# EAGLE board DevBit-MAX30102 (EAGLE 7.3.0)
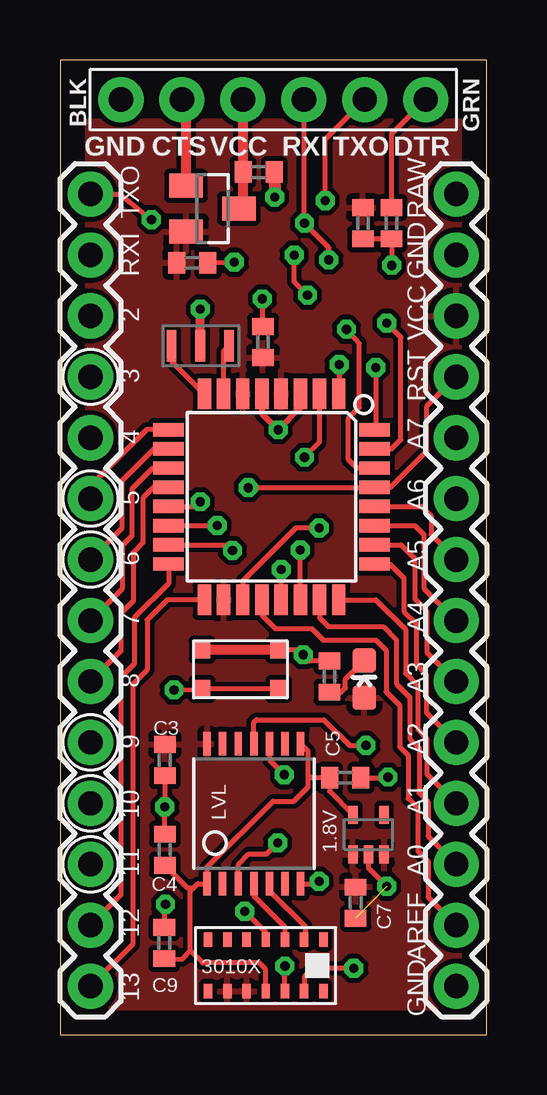
[diagram p0: board, top side]
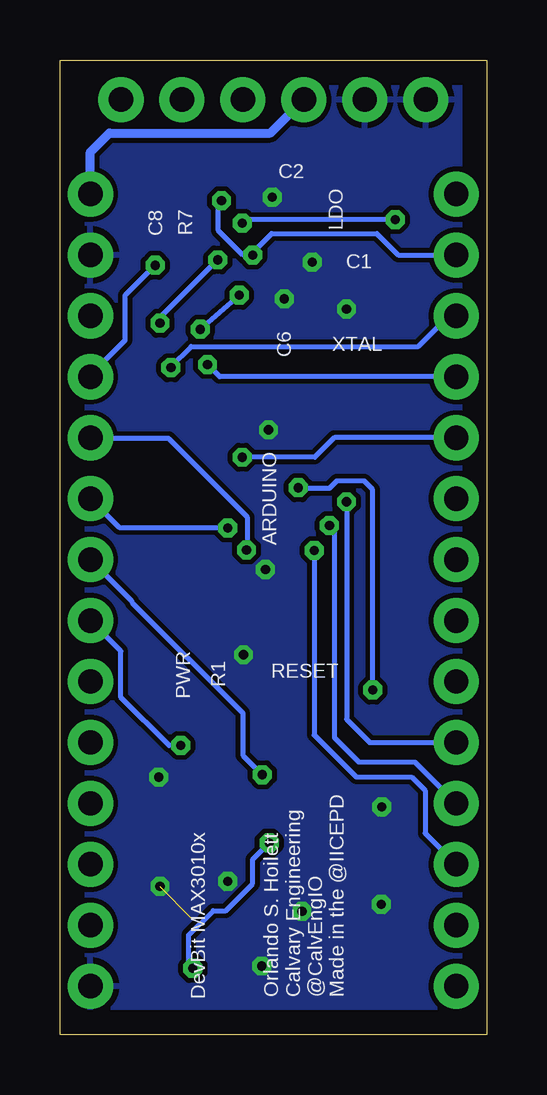
[diagram p1: board, bottom side, seen from below]

Size 17.78 x 40.64 mm. Coordinates in mm from the lower left corner, seen from the top.
Outline: 0,0 17.78,0 17.78,40.64 0,40.64 0,0
Copper layers (1*16): Top 0.035mm / dielectric 1.5mm / Bottom 0.035mm
Design rules "default": minimum track width 10mil, minimum drill 24mil, track to track 8mil, track to pad 8mil, pad to pad 8mil, via to via 8mil, smd to smd 8mil, copper to edge 40mil, drill to drill 8mil, minimum pad ring 10mil, minimum via ring 8mil, stop-mask expansion 4mil, vias tented up to drill 0mil, thermal gap 10mil

## Footprints (pad centres in the part's own frame; a part is rotated, then mirrored left to right if it is on the bottom)
SC-70-5 = smd 0.4 x 0.75: 1 -0.65,-0.825; 2 0,-0.825; 3 0.65,-0.825; 4 0.65,0.825; 5 -0.65,0.825
OESIP14 = smd 0.6 x 0.35: 1 -1.08,2.54; 2 -1.08,1.74; 3 -1.08,0.94; 4 -1.08,0.14; 5 -1.08,-0.66; 6 -1.08,-1.46; 7 -1.08,-2.26; 8 1.07,-2.26; 9 1.07,-1.46; 10 1.07,-0.66; 11 1.07,0.14; 12 1.07,0.94; 13 1.07,1.74; 14 1.07,2.54
TQFP32-08 = smd 1.27 x 0.559: 1 -4.293,2.8; 2 -4.293,2; 3 -4.293,1.2; 4 -4.293,0.4; 5 -4.293,-0.4; 6 -4.293,-1.2; 7 -4.293,-2; 8 -4.293,-2.8; 17 4.293,-2.8; 18 4.293,-2; 19 4.293,-1.2; 20 4.293,-0.4; 21 4.293,0.4; 22 4.293,1.2; 23 4.293,2; 24 4.293,2.8 | smd 0.559 x 1.27: 9 -2.8,-4.293; 10 -2,-4.293; 11 -1.2,-4.293; 12 -0.4,-4.293; 13 0.4,-4.293; 14 1.2,-4.293; 15 2,-4.293; 16 2.8,-4.293; 25 2.8,4.293; 26 2,4.293; 27 1.2,4.293; 28 0.4,4.293; 29 -0.4,4.293; 30 -1.2,4.293; 31 -2,4.293; 32 -2.8,4.293
C0402 = smd 0.7 x 0.9: 1 -0.65,0; 2 0.65,0
FTDI_DEVICE = drill 1.016 pad 1.88: CTS 3.81,0; DTR -6.35,0; GND 6.35,0; RXI -1.27,0; TXO -3.81,0; VCC 1.27,0
SOT23 = smd 1 x 1.4: 1 -0.95,-1.1; 2 0.95,-1.1; 3 0,1.1
TSSOP14 = smd 0.305 x 0.991: 1 -1.95,-2.918; 2 -1.3,-2.918; 3 -0.65,-2.918; 4 0,-2.918; 5 0.65,-2.918; 6 1.3,-2.918; 7 1.95,-2.918; 8 1.95,2.918; 9 1.3,2.918; 10 0.65,2.918; 11 0,2.918; 12 -0.65,2.918; 13 -1.3,2.918; 14 -1.95,2.918
DEVBIT-BASIC-V1 = drill 1.016 pad 1.88: 1 -8.89,17.78; 2 -8.89,15.24; 3 -8.89,12.7; 4 -8.89,10.16; 5 -8.89,7.62; 6 -8.89,5.08; 7 -8.89,2.54; 8 -8.89,0; 9 -8.89,-2.54; 10 -8.89,-5.08; 11 -8.89,-7.62; 12 -8.89,-10.16; 13 -8.89,-12.7; 14 -8.89,-15.24; 15 6.35,-15.24; 16 6.35,-12.7; 17 6.35,-10.16; 18 6.35,-7.62; 19 6.35,-5.08; 20 6.35,-2.54; 21 6.35,0; 22 6.35,2.54; 23 6.35,5.08; 24 6.35,7.62; 25 6.35,10.16; 26 6.35,12.7; 27 6.35,15.24; 28 6.35,17.78
LED-0603 = smd 1 x 1: A 0,-0.677; C 0,0.877
R0402 = smd 0.7 x 0.9: 1 -0.65,0; 2 0.65,0
BUTTON-GULLWING = smd 0.7 x 0.75: 1 -1.6,0.825; 2 1.6,0.825; 3 -1.6,-0.825; 4 1.6,-0.825
RESONATOR-00 = smd 0.4 x 1.3: 1 1.2,0; 2 0,0; 3 -1.2,0

## Placement (x,y rotation side)
1.8V  MIC5365/6  [SC-70-5]  12.85,8.36 0 top
3010X  MAX30100  [OESIP14]  8.43,2.9 270 top
ARDUINO  ATMEGA328P  [TQFP32-08]  8.81,22.43 270 top
C1  2.2u  [C0402]  5.51,32.18 0 top
C2  2.2u  [C0402]  8.28,35.97 0 top
C3  0.1u  [C0402]  4.37,11.46 270 top
C4  0.1u  [C0402]  4.37,7.72 270 top
C5  2.2u  [C0402]  11.89,10.72 0 top
C6  0.1u  [C0402]  8.46,28.88 270 top
C7  2.2u  [C0402]  12.32,5.51 90 top
C8  0.1u  [C0402]  13.82,33.83 270 top
C9  2.2u  [C0402]  4.34,3.84 270 top
JP3  FTDI_DEVICE  [FTDI_DEVICE]  8.89,38.99 180 top
LDO  AP2210  [SOT23]  6.35,34.44 270 top
LVL  [TSSOP14]  8.08,9.22 0 top
MCU  DEVBASIC-V1  [DEVBIT-BASIC-V1]  10.16,17.27 0 top
PWR  [LED-0603]  12.67,14.73 0 top
R1  1k  [R0402]  11.23,14.94 270 top
R7  10k  [R0402]  12.62,33.83 270 top
RESET  BUTTON-PTS830GG140  [BUTTON-GULLWING]  7.52,15.24 180 top
XTAL  CERALOCK-CSTCE  [RESONATOR-00]  5.84,28.73 0 top

## Library data of the parts
1.8V JP3 LDO MCU RESET XTAL = Orlando
3010X = OrlandoRonMod
ARDUINO = SparkFun-DigitalIC; PROD_ID: IC-09069
C1-C9 R1 R7 = resistor
LVL = SparkFun-DigitalIC
PWR = SparkFun-LED

## Nets
1.8V: 1.8V.5 3010X.11 C4.2 C5.1 C9.2 LVL.1 LVL.8
3.3V: 1.8V.1 1.8V.3 3010X.9 3010X.10 ARDUINO.4 ARDUINO.6 ARDUINO.18 C1.1 C3.1 C6.2 C7.2 LDO.2 LVL.14 MCU.26 PWR.A R7.1
A0: ARDUINO.23 MCU.17
A1: ARDUINO.24 MCU.18
A2: ARDUINO.25 MCU.19
A3: ARDUINO.26 MCU.20
A6: ARDUINO.19 MCU.23
A7: ARDUINO.22 MCU.24
AREF: ARDUINO.20 MCU.16
D2: ARDUINO.32 MCU.3
D3: ARDUINO.1 MCU.4
D4: ARDUINO.2 MCU.5
D5: ARDUINO.9 MCU.6
D6: ARDUINO.10 MCU.7
D7: ARDUINO.11 MCU.8
D8: ARDUINO.12 MCU.9
D9: ARDUINO.13 MCU.10
D10: ARDUINO.14 MCU.11
D11: ARDUINO.15 MCU.12
D12: ARDUINO.16 MCU.13
D13: ARDUINO.17 MCU.14
DTR: C8.1 JP3.DTR
GND: 1.8V.2 3010X.4 3010X.12 ARDUINO.3 ARDUINO.5 ARDUINO.21 C1.2 C2.2 C3.2 C4.1 C5.2 C6.1 C7.1 C9.1 JP3.CTS JP3.GND LDO.1 LVL.7 MCU.15 MCU.27 R1.1 RESET.3 RESET.4 XTAL.2
INT: LVL.12
INT-L: 3010X.13 LVL.3
N$1: ARDUINO.7 XTAL.1
N$2: ARDUINO.8 XTAL.3
N$3: PWR.C R1.2
RESET: ARDUINO.29 C8.2 MCU.25 R7.2 RESET.1 RESET.2
RXI: ARDUINO.30 JP3.TXO MCU.2
SCL: ARDUINO.28 LVL.10 MCU.22
SCL-L: 3010X.2 LVL.5
SDA: ARDUINO.27 LVL.11 MCU.21
SDA-L: 3010X.3 LVL.4
TXO: ARDUINO.31 JP3.RXI MCU.1
VIN: C2.1 JP3.VCC LDO.3 MCU.28

## Tracks (layer width: path | path; a pad name or v marks a point on that pad's centre or on a via)
1.8V
  Top 0.203: 3010X.11 8.57,2.73 8.31,3 5.94,3 5.44,3.5 | C9.2 5.09,3.16 5.44,3.5 | 5.44,3.5 5.44,5.99 5.58,6.13 | 5.58,6.13 5.74,6.3 LVL.1 6.12,6.99 8.88,9.74 9.74,9.74 10.34,10.34 10.34,10.82 | C4.2 5.31,6.13 5.58,6.13 | 10.34,10.82 10.34,11.83 LVL.8 | 10.34,10.82 10.44,10.72 C5.1 11.24,10.15 1.8V.5
3.3V
  pour Top (isolate 0.203): 0,38.1 17.78,38.1 17.78,0 0,0
A0
  Top 0.203: ARDUINO.23 10.81,17.38 11.18,17.02 13.46,17.02 14.02,16.46 14.02,14.63 14.58,14.07 14.58,12.34 14.96,11.96 14.96,10.08 15.34,9.7 15.34,8.28 MCU.17
A1
  Top 0.203: ARDUINO.24 13.16,18.14 14.4,16.89 14.4,15.06 14.91,14.55 14.91,12.72 15.29,12.34 15.29,10.87 MCU.18
A2
  Top 0.203: ARDUINO.25 13.75,19.63 14.33,19.05 14.33,17.65 14.83,17.14 14.83,15.44 15.27,15.01 15.27,13.44 MCU.19
A3
  Top 0.203: ARDUINO.26 14.22,20.43 14.78,19.86 14.78,18.16 15.29,17.65 15.29,15.95 MCU.20
A6  (via drill 0.38)
  Top 0.203: v10.79,21.13 9.83,21.13 7.62,18.92 ARDUINO.19
  Bottom 0.203: MCU.23 15.32,21.16 10.82,21.16 v10.79,21.13
A7  (via drill 0.38)
  Top 0.203: ARDUINO.22 v10.01,20.21 v10.01,20.22
  Bottom 0.203: MCU.24 16.48,24.87 13.26,24.87 9.98,21.59 9.98,20.24 v10.01,20.22
AREF
  Top 0.203: ARDUINO.20 8.41,17.49 8.97,16.94 10.49,16.94 10.97,16.46 13.16,16.46 13.59,16.03 13.59,14.3 14.15,13.74 14.15,12.01 14.5,11.66 14.5,9.86 14.91,9.45 14.91,7.67 15.34,7.24 15.34,5.74 MCU.16
D2  (via drill 0.38)
  Top 0.203: v13.16,27.81 13.16,25.28 ARDUINO.32
  Bottom 0.203: MCU.3 1.57,29.97 2.85,28.7 12.32,28.7 13.16,27.86 v13.16,27.81
D3  (via drill 0.38)
  Top 0.203: v11.63,27.94 11.63,26.74 ARDUINO.1
  Bottom 0.203: MCU.4 11.12,27.43 v11.63,27.94
D4  (via drill 0.38)
  Top 0.203: ARDUINO.2 10.79,26.7 10.79,24.69 v10.19,24.08
  Bottom 0.203: MCU.5 6.35,24.89 7.16,24.08 v10.19,24.08
D5
  Top 0.203: ARDUINO.9 3.61,25.23 1.27,22.89 MCU.6
D6
  Top 0.203: ARDUINO.10 3.9,24.43 2.56,23.09 2.56,21.11 MCU.7
D7
  Top 0.203: ARDUINO.11 3.87,23.63 3,22.76 3,20.8 2.59,20.4 2.59,18.59 MCU.8
D8
  Top 0.203: ARDUINO.12 3.9,22.83 3.45,22.38 3.45,20.52 3.05,20.12 3.05,18.09 2.54,17.58 2.54,16 MCU.9
D9  (via drill 0.38)
  Top 0.203: ARDUINO.13 5.64,22.03 v5.84,22.23 | 1.35,12.11 MCU.10
  Bottom 0.203: MCU.10 4.88,12.19 5.84,13.16 v5.84,22.23
D10  (via drill 0.38)
  Top 0.203: ARDUINO.14 v6.55,21.23
  Bottom 0.203: v6.55,21.23 6.35,21.03 6.35,12.39 5.33,11.38 3,11.38 MCU.11
D11  (via drill 0.38)
  Top 0.203: ARDUINO.15 6.95,20.43 v7.19,20.19 | 1.33,7.05 MCU.12
  Bottom 0.203: MCU.12 2.56,8.41 2.56,10.19 3.12,10.74 5.44,10.74 7.19,12.5 v7.19,20.19
D12
  Top 0.203: ARDUINO.16 4.52,18.82 3.1,17.4 3.1,15.47 2.54,14.91 2.54,5.84 MCU.13
D13
  Top 0.203: ARDUINO.17 4.47,18.14 3.63,17.3 3.63,15.21 3.02,14.61 3.02,3.79 MCU.14
DTR
  Top 0.203: C8.1 13.82,37.57 JP3.DTR
GND  (via drill 0.38, 0.38 pad 0.41)  (1 unrouted)
  Top 0.203: C1.2 v7.26,32.21 | C6.1 8.46,30.66 v8.43,30.68 | ARDUINO.21 v9.21,19.4 v9.22,19.41 | RESET.3 9.92,16.07 v10.13,15.85 10.4,15.59 R1.1 | 3010X.12 9.37,2.74 v9.37,2.87 | 3010X.4 8.57,4.28 v7.7,5.16 | C9.1 4.39,5.41 v4.39,5.44 | LVL.7 10.7,6.3 v10.79,6.4 | C4.1 v4.37,9.5 C3.2 | C5.2 13.64,10.72 v13.66,10.74 | 1.8V.2 12.85,6.96 v13.61,6.2
  Top 0.254: ARDUINO.5 8.41,25.9 v9.09,25.22 10.01,26.14 ARDUINO.3
  Top 0.381: XTAL.2 v5.84,30.25
  Top 0.406: RESET.4 RESET.3 | LDO.1 5.25,38.82 JP3.CTS
  Top 0.508: C2.2 v8.94,34.92
  pour Bottom (isolate 0.203): 0,40.64 17.78,40.72 17.78,0.08 0,0
INT-L  (via drill 0.38)
  Top 0.203: v12.24,2.77 10.54,2.77 10.19,2.41 10.19,1.84 3010X.13 | LVL.3 7.43,7.1 7.87,7.54 8.61,7.54 v9.07,8
  Bottom 0.203: v12.24,2.77 12.42,2.97 12.42,4.17 11.4,5.18 10.87,5.18 9.75,6.3 9.75,7.32 v9.07,8
N$1
  Top 0.203: ARDUINO.7 6.81,28.5 XTAL.1
N$2
  Top 0.203: XTAL.3 4.64,28.09 ARDUINO.8
N$3
  Top 0.203: R1.2 11.72,14.29 11.89,14.45 11.89,14.82 PWR.C
RESET  (via drill 0.38)
  Top 0.203: MCU.25 15.29,26.21 15.29,24.33 13.79,22.83 ARDUINO.29 13.09,22.81 v7.85,22.81 | v13.82,32.08 C8.2 R7.2 | RESET.1 RESET.2 5.78,14.36 v4.75,14.38
  Bottom 0.203: MCU.25 16.51,27.51 15.06,28.96 15.06,30.84 v13.82,32.08 | v4.75,14.38 4.75,22.73 5.11,23.09 6.25,23.09 6.55,22.78 7.82,22.78 v7.85,22.81
RXI  (via drill 0.38)
  Top 0.203: ARDUINO.30 12.36,23.63 12.01,23.98 12.01,25.7 12.47,26.16 12.47,28.83 v11.94,29.41 | v10.31,30.84 9.75,31.39 v9.75,32.51 | v11.05,34.77 11.05,37.34 JP3.TXO
  Bottom 0.203: v11.94,29.41 v10.31,30.84 | v11.05,34.77 11.18,34.65 11.18,33.53 10.16,32.51 v9.75,32.51 9.75,32.61 8.97,33.4 4.57,33.4 3.68,32.51 MCU.2
SCL  (via drill 0.38)
  Top 0.203: ARDUINO.28 15.08,22.03 15.47,21.64 15.47,20.85 MCU.22 | 9.13,11.06 v9.35,10.85 8.73,11.47 LVL.10
  Bottom 0.203: 16.46,19.86 MCU.22 14.78,18.09 14.78,18.03 10.16,13.41 10.16,11.66 v9.35,10.85
SCL-L
  Top 0.203: 3010X.2 10.21,4.01 10.21,4.52 8.73,6 LVL.5
SDA  (via drill 0.38)
  Top 0.203: ARDUINO.27 14.79,21.23 15.16,20.85 15.16,18.62 MCU.21 | v12.75,12.06 12.06,12.06 11,13.13 8.18,13.13 8.08,13.03 LVL.11
  Bottom 0.203: 16.43,17.2 MCU.21 15.24,16 15.24,14.07 13.23,12.06 v12.75,12.06
SDA-L
  Top 0.203: 3010X.3 9.37,4.5 8.08,5.79 LVL.4 | 3010X.3
TXO  (via drill 0.38, 0.38 pad 0.41)
  Top 0.203: MCU.1 2.52,35.05 v3.81,33.98 | ARDUINO.31 13.81,24.43 14.2,24.82 14.2,29.08 v13.61,29.67 | v11.2,32.31 11.2,32.82 v10.19,33.83 10.16,33.86 JP3.RXI
  Bottom 0.203: v3.81,33.98 10.03,33.98 v10.19,33.83 | v13.61,29.67 13.61,29.9 v11.2,32.31
VIN
  Top 0.406: JP3.VCC C2.1 | C2.1 | C2.1 7.62,34.61 LDO.3
  Bottom 0.254: MCU.28 16.51,35.15
  Bottom 0.381: 16.51,35.15 16.51,36.8 15.72,37.59 9.02,37.59 JP3.VCC

## Text on the board
bPlace: Orlando S. Hoilett / Calvary Engineering / @CalvEngIO / Made in the @IICEPD | DevBit MAX3010x